# Altium PCB JTAG_Adapter.PcbDoc
Units mil, origin at the board's own origin, x right, y up, seen from the top; angles counter-clockwise.
Board outline 890.07 x 1180.16 mil, 2 copper layers (Top Layer, Bottom Layer); 5 components, 8 nets, 50 pads, 0 vias.
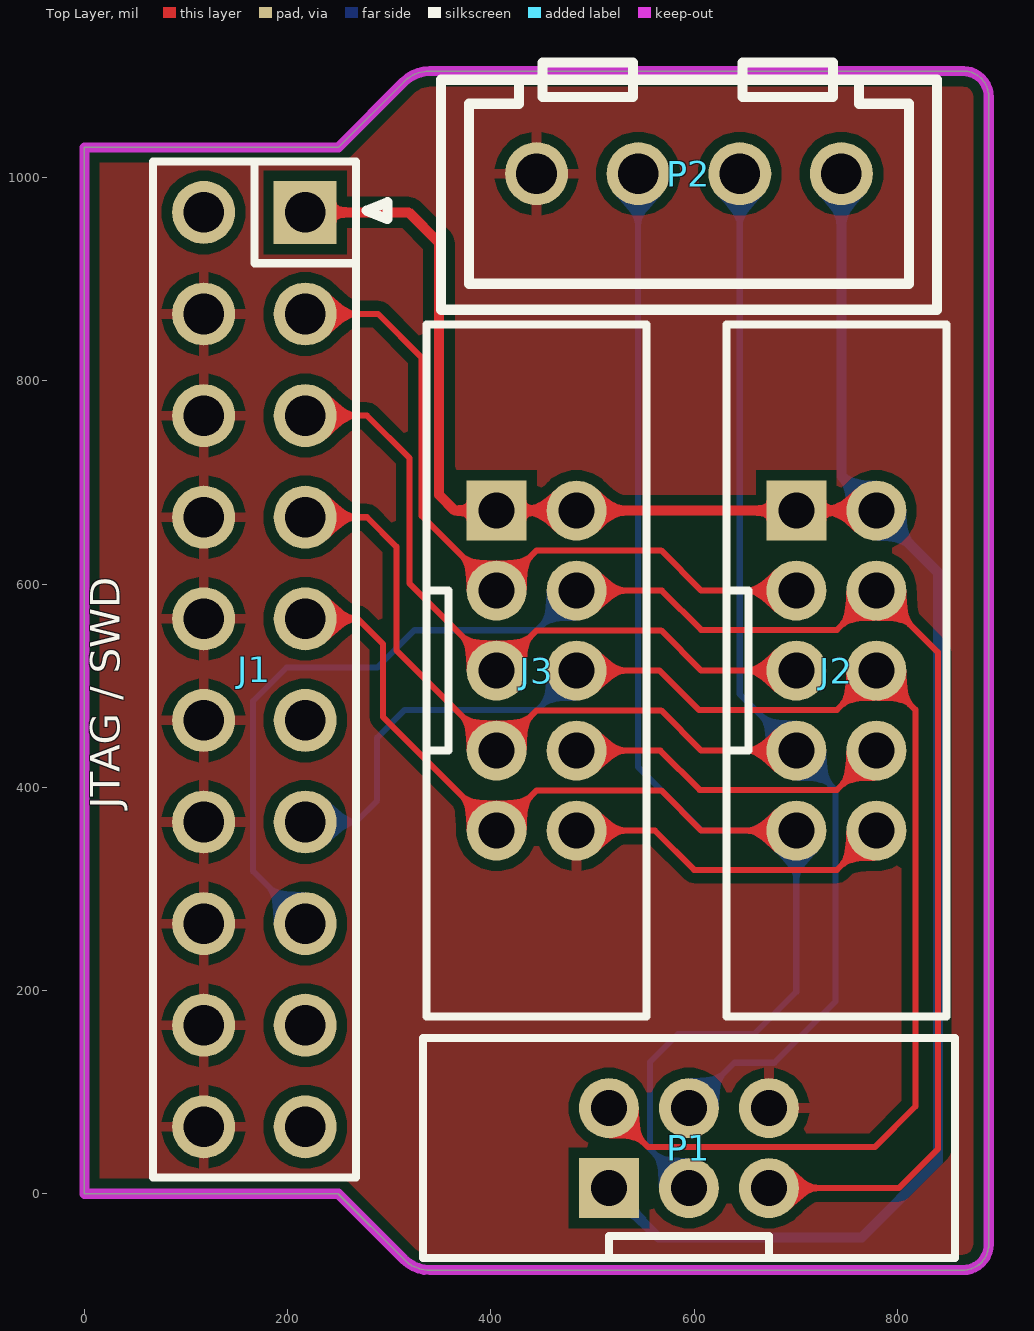
[diagram p0: Top Layer view]
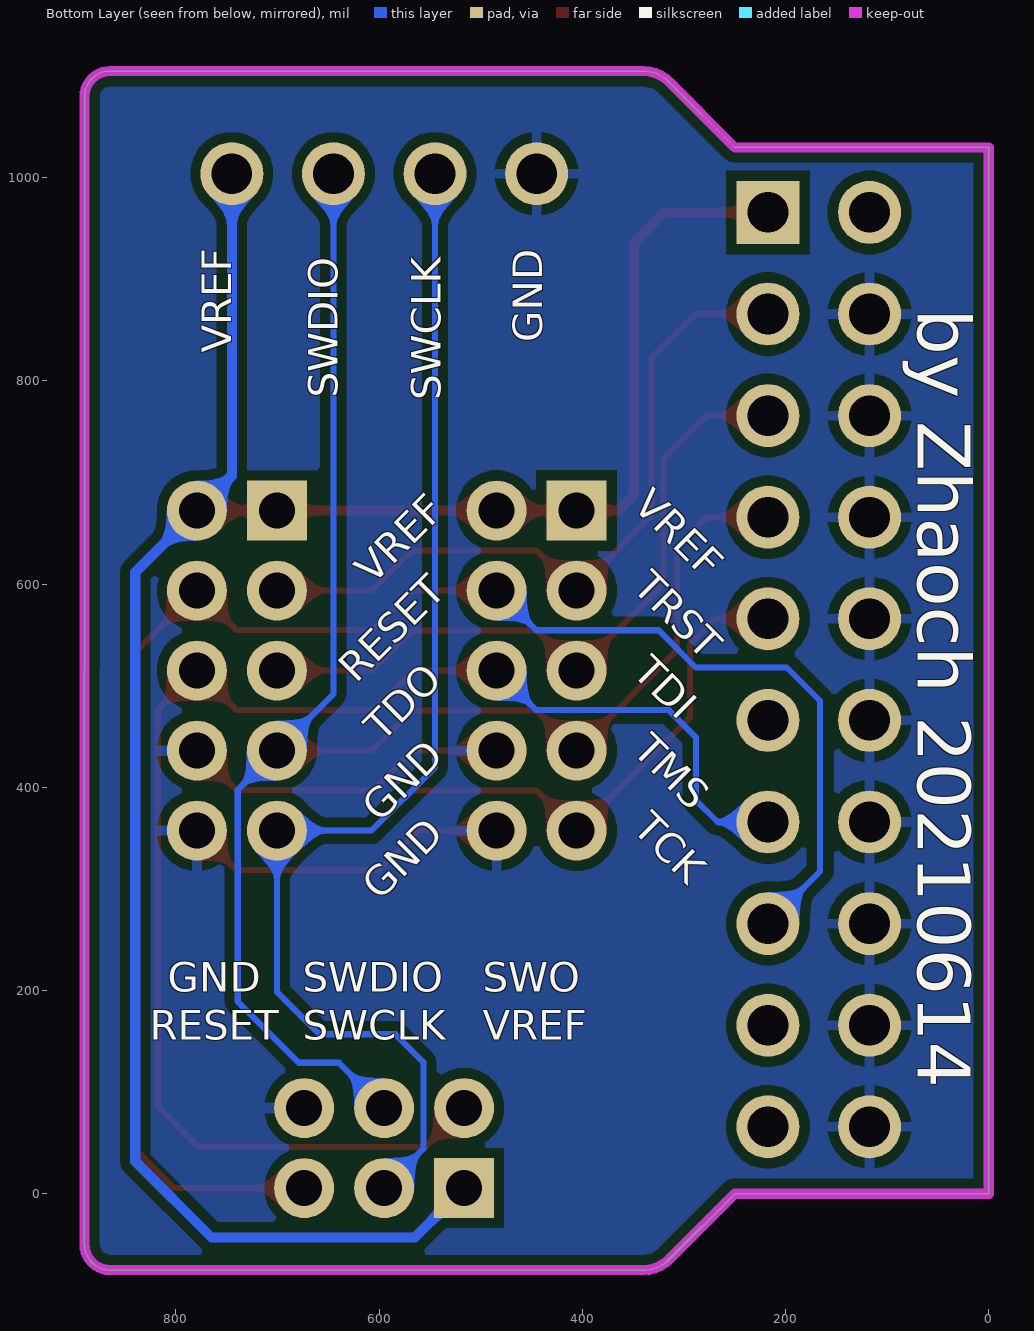
[diagram p1: Bottom Layer view, seen from below]
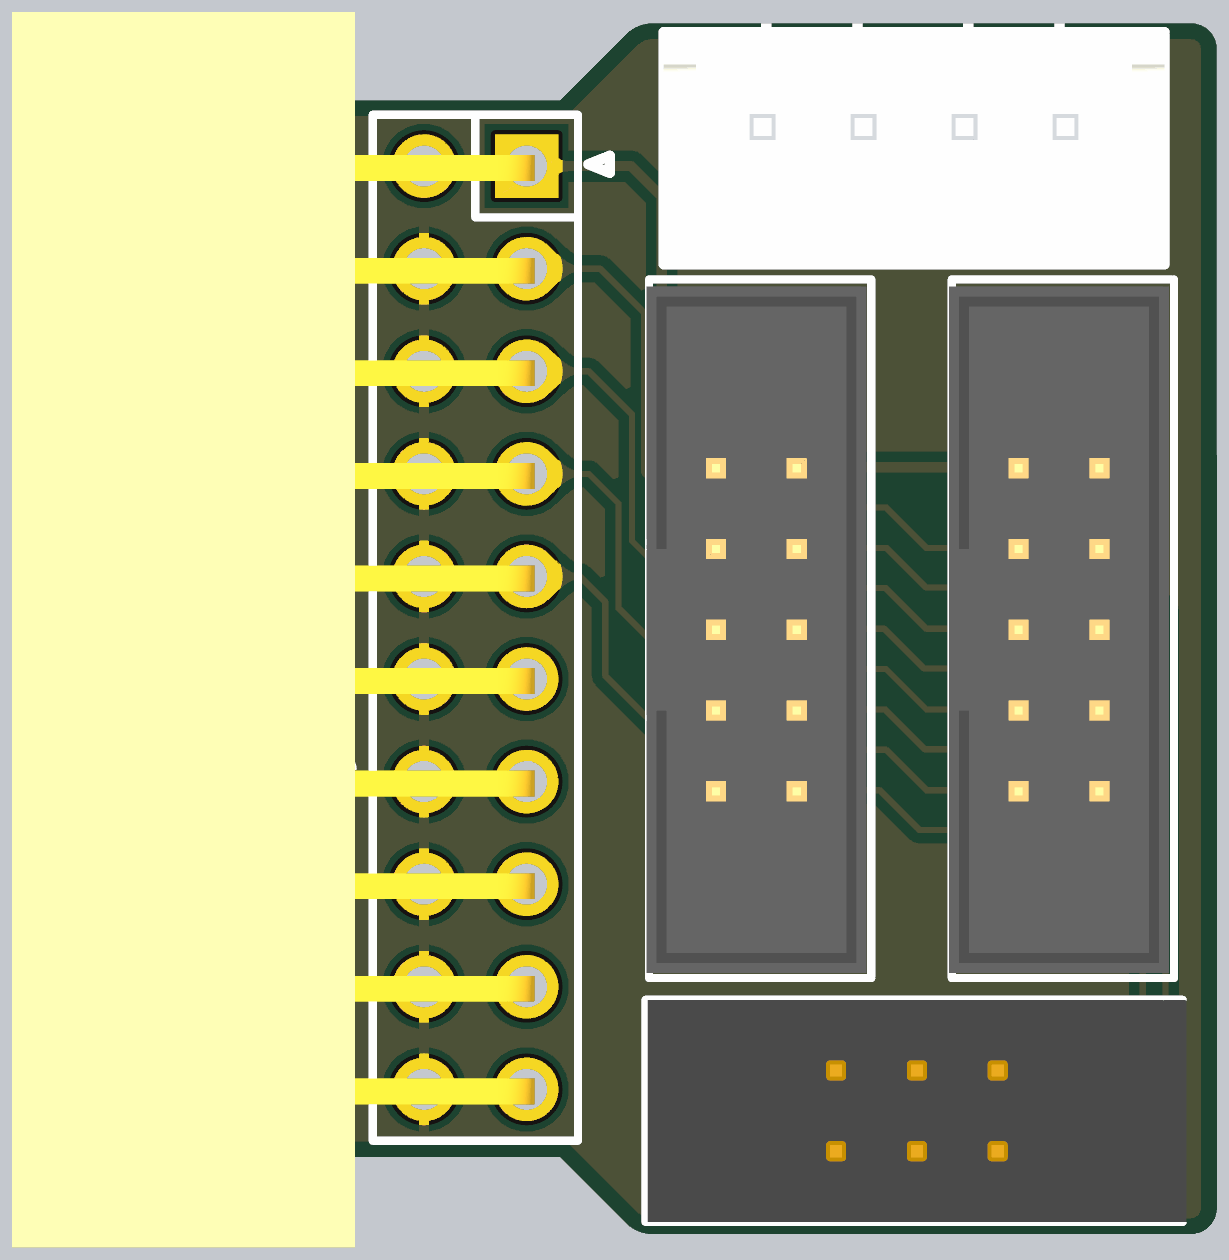
[diagram p2: 3D render of the assembled board from above, using the file's embedded part models]

## Layer stack, top to bottom
Top Solder: solder mask 0.4, Solder Resist, Dk 3.5
Top Layer: signal copper 1.4
Dielectric 1: dielectric 12.6, FR-4, Dk 4.8
Bottom Layer: signal copper 1.4
Bottom Solder: solder mask 0.4, Solder Resist, Dk 3.5

## Board outline
0,0 249.84,0 314.39,-64.55 ccw(c340,-38.94) 340,-75.16 864.65,-75.16 ccw(c864.65,-49.73) 890.07,-49.73 890,1080 ccw(c865,1080) 865,1105 340,1105 ccw(c340,1068.79) 314.39,1094.39 249.84,1029.84 0,1029.84

## Design rules (kind name [scope] priority, off if disabled: settings)
Clearance [All] p1: gap=6 ignorepadtopadclearanceinfootprint=FALSE
PolygonConnect [All] p1: connectstyle=Relief reliefconductorwidth=10 reliefentries=4 polygonreliefangle="90 Angle" airgapwidth=10
RoutingVias [All] p1: holewidth=28 width=50 viastyle="Through Hole" minholewidth=28 minwidth=50 maxholewidth=28 maxwidth=50
SolderMaskExpansion [All] p1: expansion=4 istentingtop=FALSE
UnRoutedNet [All] p1: checkbadconnections=TRUE
Width [All] p1: maxlimit=500 minlimit=6 preferedwidth=10
29 further rules are at their usual default settings.

## Components (designator, comment, footprint, x,y, rotation, side; value= is the part's Value field where it differs from the comment)
J1 "JTAG_20" JTAG_20 165.35,510 r0 top
J2 "JTAG_10" JTAG_10 740,514.92 r0 top
J3 "JTAG_10" JTAG_10 445,514.92 r0 top
P1 "Header 3X2" DIP6-2.00-BH2 595,45 r0 top
P2 "Header 4" XH2.54_4P 595,1004 r180 top

## Footprints (in the part's own frame and the unit in brackets; to place one, negate y for a bottom-side part, rotate by r counter-clockwise, add the part's x,y. Pads: shape width x height; smd on the part's side, far side on the other; paste and mask are expansions set on the pad)
DIP6-2.00-BH2 [mm]
  rect 1.5x1.5 hole 0.9: 1(-2,-1)
  round 1.5 hole 0.9: 2(-2,1) 3(0,-1) 4(0,1) 5(2,-1) 6(2,1)
  silkscreen extent -6.65,-2.75 6.65,2.75, body extent -6.6,-2.75 6.74,2.75, height 5.6
JTAG_10 [mm]
  rect 1.5x1.5 hole 0.9: 1(-1,4)
  round 1.5 hole 0.9: 2(1,4) 3(-1,2) 4(1,2) 5(-1,0) 6(1,0) 7(-1,-2) 8(1,-2) 9(-1,-4) 10(1,-4)
  silkscreen extent -2.75,-8.65 2.75,8.65, body extent -2.82,-8.53 2.63,8.47, height 5.65
JTAG_20 [mil]
  rect 62x62 hole 40: 1(51.97,455.91)
  round 62 hole 40: 2(-48.03,455.91) 3(51.97,355.91) 4(-48.03,355.91) 5(51.97,255.91) 6(-48.03,255.91) 7(51.97,155.91) 8(-48.03,155.91) 9(51.97,55.91) 10(-48.03,55.91) 11(51.97,-44.09) 12(-48.03,-44.09) 13(51.97,-144.09) 14(-48.03,-144.09) 15(51.97,-244.09) 16(-48.03,-244.09) 17(51.97,-344.09) 18(-48.03,-344.09) 19(51.97,-444.09) 20(-48.03,-444.09)
  silkscreen extent -98,-494 133,506, body extent -450,-598 60,606, height 283
XH2.54_4P [mil]
  round 62 hole 40: 1(-150,0) 2(-50,0) 3(50,0) 4(150,0)
  silkscreen extent -244,-110 244,134, body extent -244,-93 244,134, height 276

## Part data
P1: "Header, 3-Pin, Dual row"
P2: "Header, 4-Pin", LatestRevisionDate=17-Jul-2002, LatestRevisionNote="Re-released for DXP Platform.", Publisher="Altium Limited"

## Nets (pads, with @x,y where several pads share a name; then routed paths per layer and width w, separated by ;. In a path a pad name is that pad's centre, name@x,y a point inside that pad or via, vN(x,y) a via of type N, cw(c..) or ccw(c..) an arc to the next point about the centre after c; other vN are vias at no path point)
GND: J1.4 J1.6 J1.8 J1.10 J1.12 J1.14 J1.16 J1.18 J1.20 J2.8 J2.10 J3.8 J3.10 P1.6 P2.4 | length 654.1
  Top Layer w6: J3.10 561.56,357.44 600.22,318.78 740.71,318.78 J2.10 ; J3.8 566.82,436.18 605.48,397.52 740.71,397.52 J2.8
J_TCK: J1.9 J2.9 J3.9 P1.3 P2.3 | length 1881.5
  Top Layer w6: J1.9 269.09,565.91 294,541 294,469.07 J3.9 445.19,397 567.52,397 607.08,357.44 J2.9
  Bottom Layer w6: P2.3 545,420 607.56,357.44 J2.9 700.63,198.63 659,157 584,157 556.47,129.47 556.47,44.16 P1.3
J_TDI: J1.5 J2.5 J3.5 | length 692.4
  Top Layer w6: J1.5 278.09,765.91 320,724 320,600.55 J3.5 445.19,554.48 567.52,554.48 607.08,514.92 J2.5
J_TDO: J1.13 J2.6 J3.6 P1.2 | length 1471.3
  Top Layer w6: J3.6 566.08,514.92 604.74,476.26 740.71,476.26 J2.6 817.9,476.39 817.9,85.9 777.84,45.84 554.79,45.84 P1.2
  Bottom Layer w6: J1.13 266.91,365.91 288,387 288,449 315,476 445.45,476 J3.6
J_TMS: J1.7 J2.7 J3.7 P1.4 P2.2 | length 1697.9
  Top Layer w6: J1.7@231.97,665.91 278.09,665.91 307,637 307,534.81 J3.7 445.19,475.74 567.52,475.74 607.08,436.18 J2.7
  Bottom Layer w6: P1.4 639.63,129 679,129 739.16,189.16 739.16,397.65 J2.7 645,491.81 P2.2
J_TRST: J1.3 J2.3 J3.3 | length 720.1
  Top Layer w6: J1.3 289.09,865.91 332,823 332,667.29 J3.3 445.19,633.22 567.52,633.22 607.08,593.66 J2.3
RESET: J1.15 J2.4 J3.4 P1.5 | length 1687.7
  Top Layer w6: J3.4 568.34,593.66 607,555 740.71,555 J2.4 840,533.03 840,44 801.63,5.63 P1.5
  Bottom Layer w6: J1.15 166,317.23 166,485 199,518 288.18,518 324.79,554.61 445.32,554.61 J3.4
VREF: J1.1 J2.1 J2.2 J3.1 J3.2 P1.1 P2.1 | length 2215.2
  Top Layer w10: J1.1 319.09,965.91 349,936 349,688 364.6,672.4 J3.1 J3.2 J2.1 J2.2
  Bottom Layer w10: P1.1 564.89,-43 765,-43 840,32 840,611.77 J2.2 745,706.77 P2.1
pads on no net: J1.2 J1.11 J1.17 J1.19

## Polygon pours and split planes (outlines as drawn)
GND on Top Layer "GND_L01_P000" (solid, remove dead copper, pour order 0): 0,1030 250,1030 325,1105 866,1105 cw(c866,1081) 890,1081 890,-50 cw(c865,-50) 865,-75 325,-75 250,0 0,0
GND on Bottom Layer "GND_L02_P001" (solid, remove dead copper, pour order 1): 0,1030 250,1030 325,1105 866,1105 cw(c866,1081) 890,1081 890,-51 cw(c866,-51) 866,-75 325,-75 250,0 0,0

## Keep-outs
Keep-Out Layer:
  lines w10: 0,0 0,1029.84 249.84,1029.84 314.39,1094.39 cw(c340,1068.79) 340,1105 860,1105 865,1105 cw(c865,1080) 890,1080 890.07,-49.73 cw(c864.65,-49.73) 864.65,-75.16 340,-75.16 cw(c340,-38.94) 314.39,-64.55 249.84,0 0,0 ; 890,1080.07 ccw(c890,1080.07) 890,1080.07

## Silkscreen, mask and mechanical layers (free items; w line width, h text height)
Top Overlay:
  text "JTAG / SWD" at 44.5,379 h50 r90
Bottom Overlay:
  text "by Zhaoch 20210614" at 87,871 h90 r90
  text "GND" at 429.62,837.89 h50 r270
  text "VREF" at 735.76,828 h50 r270
  text "SWDIO" at 630.76,783.55 h50 r270
  text "SWCLK" at 529.76,781.15 h50 r270
  text "VREF" at 358.46,669.54 h50 r45
  text "VREF" at 599.53,591.71 h50 r315
  text "TRST" at 358.66,588.54 h50 r45
  text "TDI" at 358.9,505 h50 r45
  text "RESET" at 615.53,494.52 h50 r315
  text "TDO" at 589.96,436.34 h50 r315
  text "TMS" at 358.58,428.38 h50 r45
  text "GND" at 592.44,357.44 h50 r315
  text "TCK" at 358.66,351.54 h50 r45
  text "GND" at 592.44,280.6 h50 r315
  text "SWO" at 498.21,188.76 h50
  text "SWDIO" at 675.21,188.76 h50
  text "GND" at 808,188.76 h50
  text "VREF" at 498,141.83 h50
  text "SWCLK" at 675.21,141.76 h50
  text "RESET" at 826,141.76 h50